# Altium PCB TFTAdapter Version 3.PcbDoc (part 2 of 3)
Units mm, origin at the board's own origin, x right, y up, seen from the top; angles counter-clockwise.
Board outline 130 x 67 mm, 4 copper layers (L1, L2, L3, L4), stack 0.905 mm thick; 77 components, 105 nets, 466 pads, 376 vias.
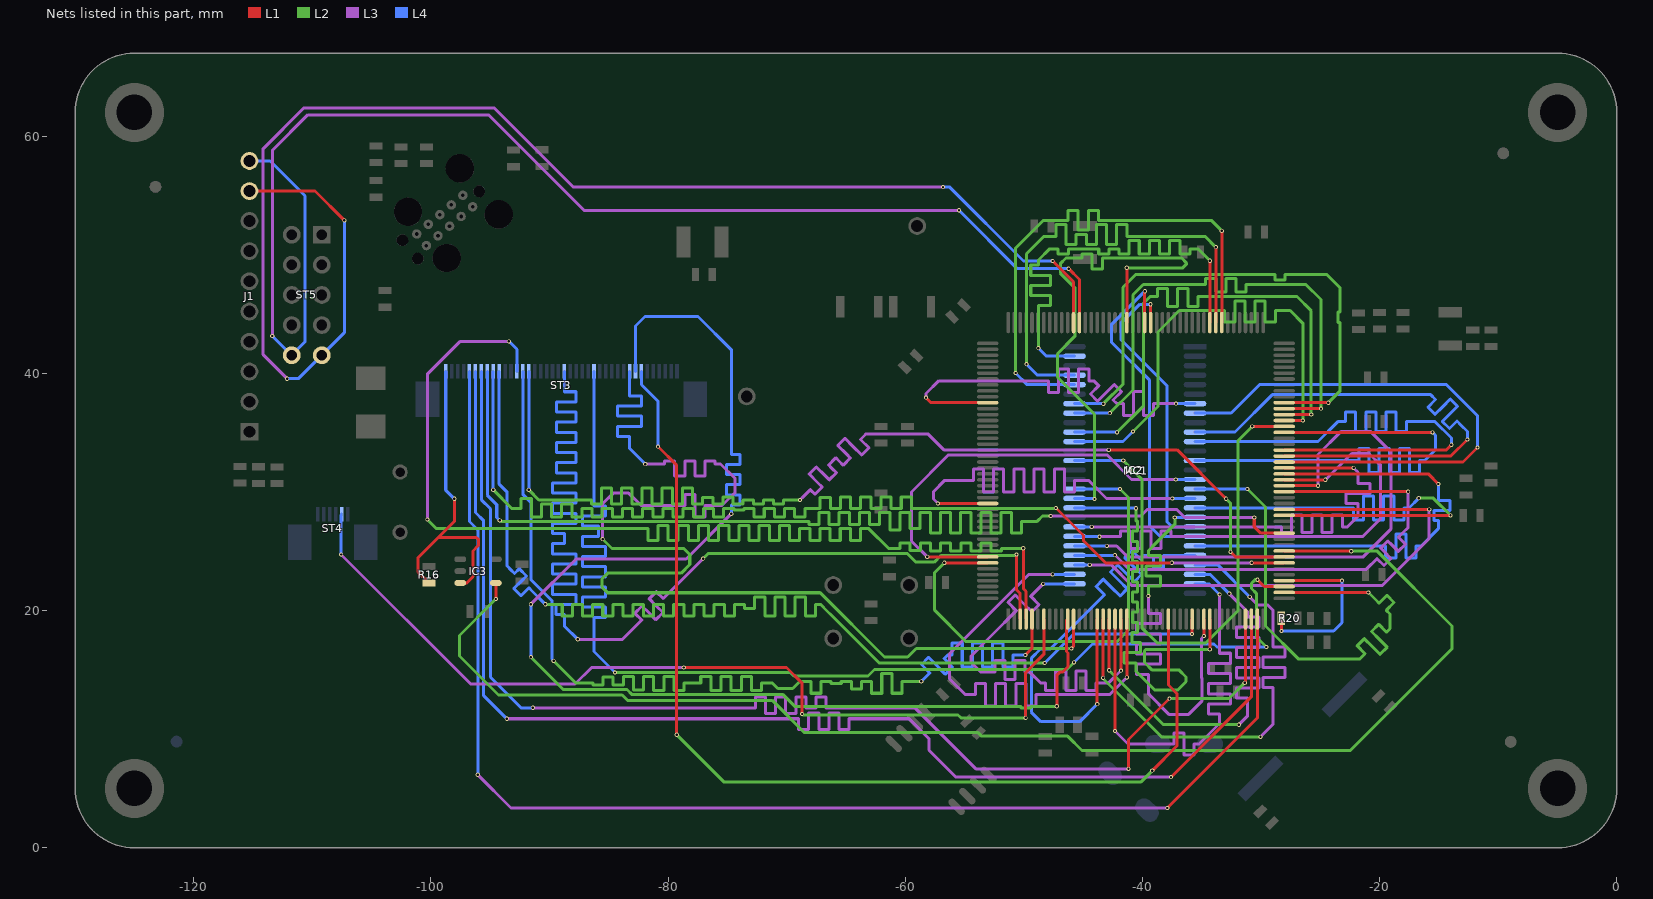
[diagram p4: the nets of this part, all layers, seen from the top]

## Via types
v1: diameter 0.35, hole 0.2, L1 to L4, 362 vias
v2: diameter 1, hole 0.5, L1 to L4, 14 vias

## Nets (pads, with @x,y where several pads share a name; then routed paths per layer and width w, separated by ;. In a path a pad name is that pad's centre, name@x,y a point inside that pad or via, vN(x,y) a via of type N, cw(c..) or ccw(c..) an arc to the next point about the centre after c; other vN are vias at no path point) (continued)
NetIC2_7: IC2.7 MC1.143 | length 47.6
  L1 w0.254: v1(-58.25,37.95) -57.825,37.525 MC1.143@-53.05,37.525
  L3 w0.254: v1(-58.25,37.95) -58.25,38.3 -57.175,39.375 -48.225,39.375 -47.943,39.375 -47.943,38.375 -47.089,38.375 -47.089,39.375 -47.089,40.375 -46.235,40.375 -46.235,39.375 -46.235,38.375 -45.381,38.375 -45.381,39.375 -45.381,40.375 -44.527,40.375 -44.527,39.375 -44.1,39.375 -43.685,38.96 -44.392,38.253 -43.788,37.649 -43.081,38.356 -42.374,39.063 -41.77,38.459 -42.477,37.752 -42.175,37.45 -41.614,37.45 -41.614,36.45 -40.76,36.45 -40.76,37.45 -40.76,38.45 -39.906,38.45 -39.906,37.45 -39.906,36.45 -39.052,36.45 -39.052,37.45 -38.625,37.45 v1(-37.175,37.45)
  L4 w0.254: v1(-37.175,37.45) IC2.7@-35.57,37.45
NetIC2_8: IC2.8 MC1.68 | length 45.4
  L1 w0.254: MC1.68@-28.05,32.525 -12.975,32.525 v1(-11.75,33.75)
  L4 w0.254: IC2.8@-35.57,36.65 -32.525,36.65 -30.123,39.052 -14.377,39.052 -11.75,36.425 v1(-11.75,33.75)
NetIC2_10: IC2.10 MC1.69 | length 47.7
  L1 w0.254: MC1.69@-28.05,33.025 -14,33.025 v1(-12.6,34.425)
  L4 w0.254: IC2.10@-35.57,35.05 -32.2,35.05 -29.05,38.2 -15.7,38.2 -15.289,37.789 -15.932,37.145 -15.328,36.541 -14.685,37.185 -14.041,37.828 -13.437,37.224 -14.081,36.581 -14.717,35.945 -14.113,35.341 -13.477,35.977 -13.175,35.675 -12.6,35.1 v1(-12.6,34.425)
NetIC2_11: IC2.11 MC1.70 | length 47.7
  L1 w0.254: MC1.70@-28.05,33.525 -14.4,33.525 v1(-13.95,33.975)
  L4 w0.254: IC2.11@-35.57,34.25 -25.2,34.25 -23.525,35.925 -23.3,35.925 -22.873,35.925 -22.873,36.755 -22.019,36.755 -22.019,35.925 -22.019,35.095 -21.165,35.095 -21.165,35.925 -21.165,36.755 -20.311,36.755 -20.311,35.925 -20.311,35.095 -19.457,35.095 -19.457,35.925 -19.457,36.755 -18.603,36.755 -18.603,35.925 -18.603,35.095 -17.749,35.095 -17.749,35.925 -16.35,35.925 -15.325,35.925 -13.95,34.55 v1(-13.95,33.975)
NetIC2_13: IC2.13 MC1.73 | length 46.7
  L1 w0.254: MC1.73@-28.05,35.025 v1(-15.55,35.025)
  L4 w0.254: IC2.13@-35.57,32.65 -22,32.65 -21.751,32.65 -21.751,33.65 -20.897,33.65 -20.897,32.65 -20.897,31.65 -20.043,31.65 -20.043,32.65 -20.043,33.65 -19.189,33.65 -19.189,32.65 -19.189,31.65 -18.335,31.65 -18.335,32.65 -18.335,33.65 -17.481,33.65 -17.481,32.65 -17.481,31.65 -16.627,31.65 -16.627,32.65 -16.2,32.65 -15.3,33.55 -15.3,34.775 v1(-15.55,35.025)
NetIC2_15: IC2.15 MC1.169 | length 37.2
  L1 w0.254: v1(-58.15,24.525) MC1.169@-53.05,24.525
  L3 w0.254: v1(-58.15,24.525) -59.475,25.85 -59.475,30 -56.35,33.125 -43,33.125 -40.925,31.05 v1(-37.2,31.05)
  L4 w0.254: v1(-37.2,31.05) IC2.15@-35.57,31.05
NetIC2_16: IC2.16 MC1.46 | length 47.7
  L1 w0.254: MC1.46@-28.05,21.525 v1(-20.95,21.525)
  L2 w0.254: v1(-31.15,30.25) -29.625,28.725 -29.625,18.7 -26.825,15.9 -21.7,15.9 -21.239,16.361 -21.899,17.022 -21.295,17.626 -20.635,16.965 -19.974,16.305 -19.371,16.909 -20.031,17.569 -20.691,18.229 -20.087,18.833 -19.427,18.173 -19.125,18.475 -19.125,19.7 -19.444,20.019 -18.784,20.679 -19.388,21.283 -20.048,20.623 -20.35,20.925 v1(-20.95,21.525)
  L4 w0.254: IC2.16@-35.57,30.25 v1(-31.15,30.25)
NetIC2_17: IC2.17 MC1.160 | length 47.7
  L1 w0.254: v1(-57.25,29.025) MC1.160@-53.05,29.025
  L3 w0.254: v1(-57.25,29.025) -57.625,29.4 -57.625,30.025 -56.675,30.975 -55.2,30.975 -54.267,30.975 -54.267,31.938 -53.413,31.938 -53.413,30.975 -53.413,30.012 -52.559,30.012 -52.559,30.975 -52.559,31.938 -51.705,31.938 -51.705,30.975 -51.705,30.012 -50.851,30.012 -50.851,30.975 -50.851,31.938 -49.997,31.938 -49.997,30.975 -49.997,30.012 -49.143,30.012 -49.143,30.975 -49.143,31.938 -48.289,31.938 -48.289,30.975 -48.289,30.012 -47.435,30.012 -47.435,30.975 -47.435,31.938 -46.581,31.938 -46.581,30.975 -46.581,30.012 -45.727,30.012 -45.727,30.975 -45.3,30.975 -44.55,30.975 -43.025,29.45 v1(-37.475,29.45)
  L4 w0.254: v1(-37.475,29.45) IC2.17@-35.57,29.45
NetIC2_18: IC2.18 MC1.59 | length 46.5
  L1 w0.254: MC1.59@-28.05,28.025 v1(-14.025,28.025)
  L2 w0.254: v1(-16.7,29.475) -15.475,29.475 v1(-14.025,28.025)
  L4 w0.254: IC2.18@-35.57,28.65 -23.05,28.65 -22.222,28.65 -22.222,27.65 -21.368,27.65 -21.368,28.65 -21.368,29.65 -20.514,29.65 -20.514,28.65 -20.514,27.65 -19.66,27.65 -19.66,28.65 -19.66,29.65 -18.806,29.65 -18.806,28.65 -18.806,27.65 -17.952,27.65 -17.952,28.65 -17.525,28.65 v1(-16.7,29.475)
NetIC2_19: IC2.19 MC1.34 | length 46.6
  L1 w0.254: v1(-34.825,17.85) -34.825,19.269 MC1.34@-34.815,19.279
  L3 w0.254: v1(-39.5,21.225) -39.5,20.175 -39.5,19.748 -38.5,19.748 -38.5,18.894 -39.5,18.894 -40.5,18.894 -40.5,18.04 -39.5,18.04 -38.5,18.04 -38.5,17.186 -39.5,17.186 -40.5,17.186 -40.5,16.332 -39.5,16.332 -38.5,16.332 -38.5,15.478 -39.5,15.478 -40.5,15.478 -40.5,14.624 -39.5,14.624 -39.5,14.325 -39.5,12.975 -37.775,11.25 -36.1,11.25 -34.998,12.352 -34.998,14.292 -35.025,14.319 -35.025,17.65 v1(-34.825,17.85)
  L2 w0.254: v1(-39.5,21.225) -39.5,21.7 -39.5,22.061 -38.5,22.061 -38.5,22.915 -39.5,22.915 -39.696,22.915 -39.696,23.769 -39.5,23.769 -38.5,23.769 -38.5,24.623 -39.5,24.623 -39.5,25.05 -39.352,25.198 -39.05,25.5 -37.275,27.275 v1(-37.275,27.85)
  L4 w0.254: v1(-37.275,27.85) IC2.19@-35.57,27.85
NetIC2_20: IC2.20 MC1.108 | length 25.6
  L1 w0.254: v1(-39.325,45.825) -39.325,44.289 MC1.108@-39.315,44.279
  L4 w0.254: v1(-39.325,45.825) -40.225,45.825 -41.825,44.225 -41.825,42.85 -37.95,38.975 -37.95,27.5 -37.5,27.05 IC2.20@-35.57,27.05
NetIC2_21: IC2.21 MC1.109 | length 29.1
  L1 w0.254: MC1.109@-39.815,44.279 -39.815,46.91 v1(-39.8,46.925)
  L4 w0.254: v1(-39.8,46.925) -42.625,44.1 -42.625,42.65 -39.425,39.45 -39.425,27.175 -38.5,26.25 IC2.21@-35.57,26.25
NetIC2_22: IC2.22 MC1.66 | length 47
  L1 w0.254: MC1.66@-28.05,31.525 -15.9,31.525 v1(-15.05,30.675)
  L4 w0.254: IC2.22@-35.57,25.45 -21.425,25.45 -19.489,25.45 -19.489,24.45 -18.635,24.45 -18.635,25.45 -18.635,26.45 -17.781,26.45 -17.781,25.45 -17.781,24.45 -16.927,24.45 -16.927,25.45 -16.5,25.45 -15.05,26.9 -15.05,27.59 -15.431,27.59 -15.431,28.444 -15.05,28.444 -14.05,28.444 -14.05,29.298 -15.05,29.298 -15.05,29.725 v1(-15.05,30.675)
NetIC2_23: IC2.23 MC1.16 | length 47.6
  L1 w0.254: v1(-43.815,12.11) MC1.16@-43.815,19.279
  L4 w0.254: v1(-43.815,12.11) -45.3,10.625 -48.575,10.625 -49.375,11.425 -49.375,15.975 -48.6,16.75 -47.775,16.75 -44.775,19.75 -43.196,21.329 -43.903,22.036 -43.3,22.64 -42.592,21.933 -41.885,21.225 -41.281,21.829 -41.989,22.536 -42.696,23.244 -42.092,23.847 -41.385,23.14 -40.678,22.433 -40.074,23.037 -40.781,23.744 -41.488,24.451 -40.884,25.055 -40.177,24.348 -39.875,24.65 -39.081,24.65 -39.081,23.65 -38.227,23.65 -38.227,24.65 -37.8,24.65 IC2.23@-35.57,24.65
NetIC2_24: IC2.24 MC1.17 | length 46.9
  L1 w0.254: v1(-43.322,14.326) -43.322,19.272 MC1.17@-43.315,19.279
  L3 w0.254: v1(-30.95,21.15) -30.25,20.45 -29.425,20.45 -29,20.025 -29,17.35 -29,16.923 -28,16.923 -28,16.069 -29,16.069 -29.835,16.069 -29.835,15.215 -29,15.215 -28,15.215 -28,14.361 -29,14.361 -29.835,14.361 -29.835,13.507 -29,13.507 -29,11.375 -29,10.4 v1(-30.05,9.35)
  L2 w0.254: v1(-43.322,14.326) -43.322,14.272 -38.4,9.35 v1(-30.05,9.35)
  L4 w0.254: IC2.24@-35.57,23.85 -33.65,23.85 v1(-30.95,21.15)
NetIC2_25: IC2.25 MC1.18 | length 47.7
  L1 w0.254: v1(-42.815,14.965) MC1.18@-42.815,19.279
  L3 w0.254: v1(-32.675,21.425) -31.125,19.875 -31.125,19.448 -30.189,19.448 -30.189,18.594 -31.125,18.594 -32.061,18.594 -32.061,17.74 -31.125,17.74 -30.189,17.74 -30.189,16.886 -31.125,16.886 -32.061,16.886 -32.061,16.032 -31.125,16.032 -30.189,16.032 -30.189,15.178 -31.125,15.178 -32.061,15.178 -32.061,14.324 -31.125,14.324 -30.189,14.324 -30.189,13.47 -31.125,13.47 -32.061,13.47 -32.061,12.616 -31.125,12.616 -31.125,11.125 v1(-31.875,10.375)
  L2 w0.254: v1(-42.815,14.965) -38.225,10.375 v1(-31.875,10.375)
  L4 w0.254: IC2.25@-35.57,23.05 -34.3,23.05 v1(-32.675,21.425)
NetIC2_26: IC2.26 MC1.19 | length 47.7
  L1 w0.254: v1(-42.315,9.84) MC1.19@-42.315,19.279
  L3 w0.254: v1(-42.315,9.84) -41.225,8.75 -38.7,8.75 -37.36,8.75 -37.36,9.685 -36.506,9.685 -36.506,8.75 -36.506,7.815 -35.652,7.815 -35.652,8.75 -35.225,8.75 -33.5,10.475 -33.5,11.274 -34.435,11.274 -34.435,12.128 -33.5,12.128 -32.565,12.128 -32.565,12.982 -33.5,12.982 -34.435,12.982 -34.435,13.836 -33.5,13.836 -32.565,13.836 -32.565,14.69 -33.5,14.69 -34.435,14.69 -34.435,15.544 -33.5,15.544 -32.565,15.544 -32.565,16.398 -33.5,16.398 -33.5,16.825 v1(-33.5,21.35)
  L4 w0.254: IC2.26@-35.57,22.25 -34.4,22.25 v1(-33.5,21.35)
NetIC2_29: IC2.29 MC1.20 | length 47
  L1 w0.254: v1(-41.815,14.935) MC1.20@-41.815,19.279
  L3 w0.254: v1(-48.375,22.25) -49.125,21.5 -49.427,21.198 -48.72,20.491 -49.324,19.887 -50.031,20.594 -50.738,21.301 -51.342,20.697 -50.635,19.99 -52.737,17.887 -54.45,16.175 -54.45,15.625 -53.625,14.8 -52.875,14.8 -52.448,14.8 -52.448,15.8 -51.594,15.8 -51.594,14.8 -51.594,14.191 -50.74,14.191 -50.74,14.8 -50.74,15.8 -49.886,15.8 -49.886,14.8 -49.5,14.8 -48.6,13.9 -48.173,13.9 -48.173,13.254 -47.319,13.254 -47.319,13.9 -47.319,14.9 -46.465,14.9 -46.465,13.9 -46.465,13.254 -45.611,13.254 -45.611,13.9 -45.611,14.9 -44.757,14.9 -44.757,13.9 -44.757,13.254 -43.903,13.254 -43.903,13.9 -43.049,13.9 -42.85,13.9 v1(-41.815,14.935)
  L4 w0.254: v1(-48.375,22.25) IC2.29@-45.73,22.25
NetIC2_30: IC2.30 MC1.21 | length 47.7
  L1 w0.254: v1(-41.315,14.36) MC1.21@-41.315,19.279
  L3 w0.254: v1(-47.575,23.05) -49.575,23.05 -56.275,16.35 -56.275,14.25 -54.925,12.9 -54.525,12.9 -54.098,12.9 -54.098,13.837 -53.244,13.837 -53.244,12.9 -53.244,11.963 -52.39,11.963 -52.39,12.9 -52.39,13.837 -51.536,13.837 -51.536,12.9 -51.536,11.963 -50.682,11.963 -50.682,12.9 -50.682,13.837 -49.828,13.837 -49.828,12.9 -49.828,11.963 -48.974,11.963 -48.974,12.9 -44.3,12.9 -42.775,12.9 v1(-41.315,14.36)
  L4 w0.254: v1(-47.575,23.05) IC2.30@-45.73,23.05
NetIC2_31: IC2.31 MC1.60 | length 47
  L1 w0.254: MC1.60@-28.05,28.525 v1(-15.825,28.525)
  L3 w0.254: v1(-44.45,23.85) -42.625,23.85 -40.875,22.1 -19.8,22.1 -15.825,26.075 v1(-15.825,28.525)
  L4 w0.254: IC2.31@-45.73,23.85 v1(-44.45,23.85)
NetIC2_32: IC2.32 MC1.63 | length 47.7
  L1 w0.254: MC1.63@-28.05,30.025 v1(-17.6,30.025)
  L3 w0.254: v1(-42.325,24.675) -41.125,23.475 -21.125,23.475 -20.226,24.374 -19.641,23.789 -19.037,24.393 -19.622,24.978 -19.913,25.268 -19.309,25.872 -19.018,25.582 -18.433,24.996 -17.829,25.6 -18.414,26.186 -18.113,26.487 -17.6,27 v1(-17.6,30.025)
  L4 w0.254: IC2.32@-45.73,24.65 -42.35,24.65 v1(-42.325,24.675)
NetIC2_33: IC2.33 MC1.64 | length 47.7
  L1 w0.254: MC1.64@-28.05,30.525 v1(-25.2,30.525)
  L3 w0.254: v1(-43,25.45) -42.175,25.45 -41.225,24.5 -21.425,24.5 -19.025,26.9 -19.025,33.35 -20.75,35.075 -23.275,35.075 -25.2,33.15 v1(-25.2,30.525)
  L4 w0.254: IC2.33@-45.73,25.45 v1(-43,25.45)
NetIC2_34: IC2.34 MC1.65 | length 47.2
  L1 w0.254: MC1.65@-28.05,31.025 v1(-24.575,31.025)
  L3 w0.254: v1(-43.625,26.225) -42.275,26.225 -41.848,26.225 -41.848,26.696 -40.994,26.696 -40.994,26.225 -40.994,25.225 -40.14,25.225 -40.14,26.225 -40.14,26.696 -39.286,26.696 -39.286,26.225 -39.286,25.225 -38.432,25.225 -38.432,26.225 -38.432,26.696 -37.578,26.696 -37.578,26.225 -35.4,26.225 -21.45,26.225 -19.95,27.725 -19.95,32.3 -20.9,33.25 -22.35,33.25 v1(-24.575,31.025)
  L4 w0.254: IC2.34@-45.73,26.25 -43.65,26.25 v1(-43.625,26.225)
NetIC2_35: IC2.35 MC1.67 | length 47.2
  L1 w0.254: MC1.67@-28.05,32.025 v1(-22.2,32.025)
  L3 w0.254: v1(-44.275,27.05) -28.375,27.05 -28.276,27.05 -28.276,26.579 -27.422,26.579 -27.422,27.05 -27.422,28.05 -26.568,28.05 -26.568,27.05 -26.568,26.579 -25.714,26.579 -25.714,27.05 -25.714,28.05 -24.86,28.05 -24.86,27.05 -24.86,26.579 -24.006,26.579 -24.006,27.05 -24.006,28.05 -23.152,28.05 -23.152,27.05 -22.725,27.05 -21.825,27.95 -21.825,28.161 -21.825,29.015 -22.825,29.015 -22.825,29.869 -21.825,29.869 -20.825,29.869 -20.825,30.723 -21.825,30.723 -21.825,31.15 -21.825,31.65 v1(-22.2,32.025)
  L4 w0.254: IC2.35@-45.73,27.05 v1(-44.275,27.05)
NetIC2_37: IC2.37 MC1.35 | length 45.5
  L1 w0.254: v1(-34.325,16.725) -34.325,19.269 MC1.35@-34.315,19.279
  L2 w0.254: v1(-40.55,28.625) -40.55,27.975 -40.55,27.548 -40.404,27.548 -40.404,26.694 -40.55,26.694 -40.821,26.694 -40.821,25.84 -40.55,25.84 -40.404,25.84 -40.404,24.986 -40.55,24.986 -40.821,24.986 -40.821,24.132 -40.55,24.132 -40.404,24.132 -40.404,23.278 -40.55,23.278 -40.821,23.278 -40.821,22.424 -40.55,22.424 -40.404,22.424 -40.404,21.57 -40.55,21.57 -40.821,21.57 -40.821,20.716 -40.55,20.716 -40.404,20.716 -40.404,19.862 -40.55,19.862 -40.821,19.862 -40.821,19.008 -40.55,19.008 -40.404,19.008 -40.404,18.154 -40.55,18.154 -40.88,18.154 -40.88,17.3 -40.55,17.3 -40.179,17.3 -40.179,16.446 -40.55,16.446 -41.55,16.446 -41.55,15.592 -40.55,15.592 -40.55,14.875 -38.975,13.3 -37.025,13.3 -36.325,14 -36.325,14.4 -36.9,14.975 -39.175,14.975 -39.825,15.625 -39.825,16.6 -39.7,16.725 v1(-34.325,16.725)
  L4 w0.254: IC2.37@-45.73,28.65 -40.575,28.65 v1(-40.55,28.625)
NetIC2_38: IC2.38 MC1.112 | length 47.4
  L1 w0.254: v1(-41.325,48.9) -41.325,44.289 MC1.112@-41.315,44.279
  L2 w0.254: v1(-44.05,29.4) -44.05,36.55 -47.175,39.675 -47.175,41.65 -45.7,43.125 -45.7,47.225 -46.925,48.45 -46.925,49.25 -46.45,49.725 -45.525,49.725 -45.098,49.725 -45.098,50.062 -44.244,50.062 -44.244,49.725 -44.244,48.809 -43.39,48.809 -43.39,49.725 -39.85,49.725 -36.7,49.725 -36.3,49.325 -36.3,49.2 -36.6,48.9 v1(-41.325,48.9)
  L4 w0.254: IC2.38@-45.73,29.45 -44.1,29.45 v1(-44.05,29.4)
NetIC2_39: IC2.39 MC1.170 | length 41.9
  L1 w0.254: v1(-56.7,24.025) MC1.170@-53.05,24.025
  L2 w0.254: v1(-56.7,24.025) -57.525,23.2 -57.525,20.025 -54.875,17.375 -42.15,17.375 -41.175,18.35 -41.175,29.525 v1(-41.9,30.25)
  L4 w0.254: IC2.39@-45.73,30.25 v1(-41.9,30.25)
NetIC2_42: IC2.42 MC1.74 | length 47.4
  L1 w0.254: v1(-30.75,35.525) MC1.74@-28.05,35.525
  L2 w0.254: v1(-41.625,32.65) -40.05,31.075 -40.05,18.55 -38.775,17.275 -34.65,17.275 -31.95,19.975 -31.95,20.981 -31.952,20.983 -31.952,21.317 -31.95,21.319 -31.95,22.856 -31.952,22.858 -31.952,34.323 v1(-30.75,35.525)
  L4 w0.254: IC2.42@-45.73,32.65 v1(-41.625,32.65)
NetIC2_44: IC2.44 MC1.75 | length 46.8
  L1 w0.254: MC1.75@-28.05,36.025 v1(-26.475,36.025)
  L2 w0.254: v1(-40.8,35.1) -38.7,37.2 -38.7,43.488 -36.888,45.3 -35.18,45.3 -34.05,45.3 -33.072,45.3 -33.072,44.32 -32.218,44.32 -32.218,45.3 -32.218,46.101 -31.364,46.101 -31.364,45.3 -31.364,44.32 -30.51,44.32 -30.51,45.3 -30.51,46.101 -29.656,46.101 -29.656,45.3 -29.656,44.32 -28.802,44.32 -28.802,45.3 -28.375,45.3 -27.55,45.3 -26.475,44.225 v1(-26.475,36.025)
  L4 w0.254: IC2.44@-45.73,34.25 -41.65,34.25 v1(-40.8,35.1)
NetIC2_45: IC2.45 MC1.76 | length 47.3
  L1 w0.254: MC1.76@-28.05,36.525 v1(-25.775,36.525)
  L2 w0.254: v1(-42.15,35.025) -39.9,37.275 -39.9,45.925 -39.35,46.475 -39.225,46.475 -38.743,46.475 -38.743,47.146 -37.889,47.146 -37.889,46.475 -37.889,45.654 -37.035,45.654 -37.035,46.475 -37.035,47.146 -36.181,47.146 -36.181,46.475 -36.181,45.654 -35.327,45.654 -35.327,46.475 -34.9,46.475 -26.975,46.475 -25.775,45.275 v1(-25.775,36.525)
  L4 w0.254: IC2.45@-45.73,35.05 -42.175,35.05 v1(-42.15,35.025)
NetIC2_47: IC2.47 MC1.77 | length 47.4
  L1 w0.254: MC1.77@-28.05,37.025 v1(-24.95,37.025)
  L2 w0.254: v1(-42.75,36.65) -40.8,38.6 -40.8,46.625 -39.925,47.5 -37.625,47.5 -34.668,47.5 -34.668,47.981 -33.814,47.981 -33.814,47.5 -33.814,46.844 -32.96,46.844 -32.96,47.5 -32.96,47.981 -32.106,47.981 -32.106,47.5 -32.106,46.844 -31.252,46.844 -31.252,47.5 -30.825,47.5 -26.225,47.5 -24.95,46.225 v1(-24.95,37.025)
  L4 w0.254: IC2.47@-45.73,36.65 v1(-42.75,36.65)
NetIC2_48: IC2.48 MC1.78 | length 47.4
  L1 w0.254: MC1.78@-28.05,37.525 v1(-24.325,37.525)
  L2 w0.254: v1(-43.3,37.425) -41.65,39.075 -41.65,47.25 -40.55,48.35 -39.425,48.35 -28.831,48.35 -28.831,47.854 -27.977,47.854 -27.977,48.35 -27.55,48.35 -24.475,48.35 -23.325,47.2 -23.325,45.156 -23.494,45.156 -23.494,44.302 -23.325,44.302 -23.325,43.875 -23.325,38.525 v1(-24.325,37.525)
  L4 w0.254: IC2.48@-45.73,37.45 -43.325,37.45 v1(-43.3,37.425)
NetIC2_50: IC2.50 MC1.96 | length 47.4
  L1 w0.254: MC1.96@-33.315,44.279 v1(-33.315,52.015)
  L2 w0.254: v1(-50.7,40.025) -50.7,50.55 -48.35,52.9 -46.7,52.9 -46.273,52.9 -46.273,53.733 -45.419,53.733 -45.419,52.9 -45.419,52.071 -44.565,52.071 -44.565,52.9 -44.565,53.733 -43.711,53.733 -43.711,52.9 -38.125,52.9 -34.2,52.9 v1(-33.315,52.015)
  L4 w0.254: v1(-50.7,40.025) -49.725,39.05 IC2.50@-45.73,39.05
NetIC2_51: IC2.51 MC1.97 | length 47.4
  L1 w0.254: MC1.97@-33.815,44.279 v1(-33.815,50.64)
  L2 w0.254: v1(-49.775,40.775) -49.775,50.075 -48.3,51.55 -47.725,51.55 -47.298,51.55 -47.298,52.534 -46.444,52.534 -46.444,51.55 -46.444,50.866 -45.59,50.866 -45.59,51.55 -45.59,51.705 -44.736,51.705 -44.736,51.55 -44.736,50.866 -43.882,50.866 -43.882,51.55 -43.882,52.534 -43.028,52.534 -43.028,51.55 -43.028,50.866 -42.174,50.866 -42.174,51.55 -42.174,52.534 -41.32,52.534 -41.32,51.55 -35.425,51.55 -34.725,51.55 v1(-33.815,50.64)
  L4 w0.254: v1(-49.775,40.775) -48.85,39.85 IC2.51@-45.73,39.85
NetIC2_53: IC2.53 MC1.98 | length 47
  L1 w0.254: MC1.98@-34.315,44.279 v1(-34.315,49.49)
  L2 w0.254: v1(-48.775,42.125) -48.775,45.2 -48.775,45.707 -47.775,45.707 -47.775,46.561 -48.775,46.561 -49.421,46.561 -49.421,47.415 -48.775,47.415 -47.775,47.415 -47.775,48.269 -48.775,48.269 -49.421,48.269 -49.421,49.123 -48.775,49.123 -48.775,49.55 -47.825,50.5 -47.104,50.5 -47.104,50.079 -46.25,50.079 -46.25,50.5 -45.396,50.5 -44.542,50.5 -43.688,50.5 -43.688,50.079 -42.834,50.079 -42.834,50.5 -41.98,50.5 -41.98,50.079 -41.126,50.079 -41.126,50.5 -41.126,51.196 -40.272,51.196 -40.272,50.5 -40.272,50.079 -39.418,50.079 -39.418,50.5 -39.418,51.196 -38.564,51.196 -38.564,50.5 -38.564,50.079 -37.71,50.079 -37.71,50.5 -37.71,51.196 -36.856,51.196 -36.856,50.5 -36.856,50.079 -36.002,50.079 -36.002,50.5 -35.575,50.5 -35.325,50.5 v1(-34.315,49.49)
  L4 w0.254: v1(-48.775,42.125) -48.1,41.45 IC2.53@-45.73,41.45
NetIC3_3: IC3.3 R16.2 ST3.1 | length 27.9
  L1 w0.254: R16.2@-100.15,22.325 -101.1,23.275 -101.1,24.425 -99.375,26.15 ; v1(-98.025,29.425) -98.025,27.5 -99.375,26.15 ; IC3.3@-97.525,22.325 -96.975,22.325 -96.45,22.85 -96.45,25.025 -96,25.475 -96,26 -96.15,26.15 -99.375,26.15
  L4 w0.254: ST3.1@-98.75,40.175 -98.75,30.15 v1(-98.025,29.425)
NetIC3_4: IC3.4 MC1.53 | length 116.7
  L1 w0.254: v1(-94.525,20.975) IC3.4@-94.525,22.325 ; MC1.53@-28.05,25.025 -22.425,25.025 v1(-22.4,25)
  L2 w0.254: v1(-94.525,20.975) -97.6,17.9 -97.6,16.175 -94.3,12.875 -83.875,12.875 -83.425,12.425 -71.225,12.425 -68.5,9.7 -53.85,9.7 -53.56,9.41 -46.31,9.41 -45.1,8.2 -22.475,8.2 -13.9,16.775 -13.9,18.7 -20.2,25 v1(-22.4,25)
NetJ1_9: J1.9 MC1.121 ST5.9 | length 124.4
  L1 w0.254: J1.9@-115.3,55.37 -109.77,55.37 v1(-107.3,52.9) ; v1(-47.575,49.475) -45.815,47.715 MC1.121@-45.815,44.279
  L3 w0.254: v1(-112.125,39.55) -114.15,41.575 -114.15,58.95 -110.725,62.375 -94.65,62.375 -87.975,55.7 v1(-56.825,55.7)
  L4 w0.254: v1(-112.125,39.55) -111.18,39.55 ST5.9@-109.2,41.53 -107.3,43.43 v1(-107.3,52.9) ; v1(-56.825,55.7) -56.25,55.7 -50.025,49.475 v1(-47.575,49.475)
NetJ1_10: J1.10 MC1.120 ST5.10 | length 116.4
  L1 w0.254: v1(-46.225,48.825) -45.315,47.915 MC1.120@-45.315,44.279
  L3 w0.254: v1(-113.375,43.15) -113.375,58.8 -110.375,61.8 -95.15,61.8 -87.1,53.75 v1(-55.475,53.75)
  L4 w0.254: J1.10@-115.3,57.91 -113.56,57.91 -110.625,54.975 -110.625,42.66 -111.755,41.53 v1(-113.375,43.15) ; v1(-55.475,53.75) -50.55,48.825 v1(-46.225,48.825)
NetMC1_3: MC1.3 ST3.21 | length 112.7
  L1 w0.254: v1(-50.625,24.725) -50.625,21.75 -50.315,21.44 MC1.3@-50.315,19.279
  L3 w0.254: v1(-87.625,17.575) -83.85,17.575 -82.525,18.9 -82.223,19.202 -82.802,19.781 -82.198,20.384 -81.619,19.806 -81.041,19.227 -80.437,19.831 -81.015,20.41 -81.594,20.988 -80.99,21.592 -80.411,21.014 -79.137,22.288 v1(-77.05,24.375)
  L2 w0.254: v1(-77.05,24.375) -76.6,24.825 -59.85,24.825 -59.107,24.082 -57.568,24.082 -57,24.65 -50.7,24.65 v1(-50.625,24.725)
  L4 w0.254: ST3.21@-88.75,40.175 -88.75,38.875 -88.75,38.448 -87.75,38.448 -87.75,37.594 -88.75,37.594 -89.4,37.594 -89.4,36.74 -88.75,36.74 -87.75,36.74 -87.75,35.886 -88.75,35.886 -89.396,35.886 -89.396,35.032 -88.75,35.032 -87.75,35.032 -87.75,34.178 -88.75,34.178 -89.396,34.178 -89.396,33.324 -88.75,33.324 -87.75,33.324 -87.75,32.47 -88.75,32.47 -89.396,32.47 -89.396,31.616 -88.75,31.616 -87.75,31.616 -87.75,30.762 -88.75,30.762 -89.75,30.762 -89.75,29.908 -88.75,29.908 -87.75,29.908 -87.75,29.054 -88.75,29.054 -89.75,29.054 -89.75,28.2 -88.75,28.2 -87.75,28.2 -87.75,27.346 -88.75,27.346 -89.75,27.346 -89.75,26.492 -88.75,26.492 -88.75,25.638 -89.75,25.638 -89.75,24.784 -88.75,24.784 -87.75,24.784 -87.75,23.93 -88.75,23.93 -89.75,23.93 -89.75,23.076 -88.75,23.076 -87.75,23.076 -87.75,22.222 -88.75,22.222 -89.75,22.222 -89.75,21.368 -88.75,21.368 -87.75,21.368 -87.75,20.514 -88.75,20.514 -89.446,20.514 -89.446,19.66 -88.75,19.66 -88.75,19.2 -88.75,18.7 v1(-87.625,17.575)
NetMC1_4: MC1.4 ST3.13 | length 112.7
  L1 w0.254: v1(-50.05,25.25) -50.05,21.85 -49.815,21.615 MC1.4@-49.815,19.279
  L3 w0.254: v1(-100.3,27.675) -100.3,39.925 -97.525,42.7 v1(-93.425,42.7)
  L2 w0.254: v1(-100.3,27.675) -99.525,26.9 -82.725,26.9 -81.711,26.9 -81.711,25.908 -80.857,25.908 -80.857,26.9 -80.857,27.163 -80.003,27.163 -80.003,26.9 -80.003,25.908 -79.149,25.908 -79.149,26.9 -79.149,27.163 -78.295,27.163 -78.295,26.9 -78.295,25.908 -77.441,25.908 -77.441,26.9 -77.441,27.163 -76.587,27.163 -76.587,26.9 -76.587,25.908 -75.733,25.908 -75.733,26.9 -75.733,27.163 -74.879,27.163 -74.879,26.9 -74.879,25.908 -74.025,25.908 -74.025,26.9 -74.025,27.163 -73.171,27.163 -73.171,26.9 -73.171,25.908 -72.317,25.908 -72.317,26.9 -72.317,27.163 -71.463,27.163 -71.463,26.9 -71.463,25.908 -70.609,25.908 -70.609,26.9 -70.609,27.163 -69.755,27.163 -69.755,26.9 -69.755,25.908 -68.901,25.908 -68.901,26.9 -68.047,26.9 -68.047,25.908 -67.193,25.908 -67.193,26.9 -66.339,26.9 -66.339,25.908 -65.485,25.908 -65.485,26.9 -64.631,26.9 -64.631,25.908 -63.777,25.908 -63.777,26.9 -63.35,26.9 -63.075,26.9 -61.425,25.25 -60.825,25.25 -60.442,25.25 -60.442,25.696 -59.588,25.696 -59.588,25.25 -59.588,25.064 -58.734,25.064 -58.734,25.25 -58.734,25.696 -57.88,25.696 -57.88,25.25 -57.88,25.003 -57.026,25.003 -57.026,25.25 -57.026,25.696 -56.172,25.696 -56.172,25.25 -56.172,25.004 -55.318,25.004 -55.318,25.25 -55.318,25.696 -54.464,25.696 -54.464,25.25 -54.464,25.004 -53.61,25.004 -53.61,25.25 -53.61,25.696 -52.756,25.696 -52.756,25.25 -52.756,25.004 -51.902,25.004 -51.902,25.25 -51.475,25.25 v1(-50.05,25.25)
  L4 w0.254: v1(-93.425,42.7) -92.75,42.025 ST3.13@-92.75,40.175
NetMC1_5: MC1.5 ST3.14 | length 111.3
  L1 w0.254: v1(-49.875,16.25) -49.315,16.81 MC1.5@-49.315,19.279
  L2 w0.254: v1(-89.65,15.75) -88,14.1 -87.775,13.875 -86.338,13.875 -86.338,13.704 -85.484,13.704 -85.484,13.875 -85.484,14.404 -84.63,14.404 -84.63,13.875 -84.63,13.704 -83.776,13.704 -83.776,13.875 -83.776,14.421 -82.922,14.421 -82.922,13.875 -82.922,13.298 -82.068,13.298 -82.068,13.875 -82.068,14.421 -81.214,14.421 -81.214,13.875 -81.214,13.254 -80.36,13.254 -80.36,13.875 -80.36,14.421 -79.506,14.421 -79.506,13.875 -79.506,13.254 -78.652,13.254 -78.652,13.875 -78.225,13.875 -77.675,13.875 -77.248,13.875 -77.248,14.421 -76.394,14.421 -76.394,13.875 -76.394,13.254 -75.54,13.254 -75.54,13.875 -75.54,14.421 -74.686,14.421 -74.686,13.875 -74.686,13.254 -73.832,13.254 -73.832,13.875 -73.832,14.421 -72.978,14.421 -72.978,13.875 -72.978,13.254 -72.124,13.254 -72.124,13.875 -71.325,13.875 -71.2,13.875 -70.75,13.425 -69.5,13.425 -68.9,14.025 -68.817,14.025 -67.963,14.025 -67.963,13.025 -67.109,13.025 -67.109,14.025 -66.255,14.025 -66.255,13.857 -65.401,13.857 -65.401,14.025 -64.547,14.025 -64.547,13.377 -63.693,13.377 -63.693,14.025 -62.839,14.025 -62.839,13.025 -61.985,13.025 -61.985,14.025 -61.985,14.671 -61.131,14.671 -61.131,14.025 -61.131,13.025 -60.277,13.025 -60.277,14.025 -59.85,14.025 v1(-58.65,14.025)
  L4 w0.254: ST3.14@-92.25,40.175 -92.25,29.8 -91.55,29.1 -91.55,22.575 -89.8,20.825 -89.8,15.9 v1(-89.65,15.75) ; v1(-58.65,14.025) -58.175,14.5 -57.935,14.74 -58.642,15.447 -58.038,16.051 -57.331,15.344 -56.624,14.637 -56.02,15.241 -56.727,15.948 -56.425,16.25 -56.051,16.25 -56.051,17.25 -55.197,17.25 -55.197,16.25 -55.197,15.25 -54.343,15.25 -54.343,16.25 -54.343,17.25 -53.489,17.25 -53.489,16.25 -53.489,15.25 -52.635,15.25 -52.635,16.25 -52.635,17.25 -51.781,17.25 -51.781,16.25 -51.781,15.25 -50.927,15.25 -50.927,16.25 -50.5,16.25 v1(-49.875,16.25)
NetMC1_7: MC1.7 ST4.5 | length 78.5
  L1 w0.254: v1(-78.675,15.2) -70.025,15.2 -68.7,13.875 v1(-68.7,11.275) ; v1(-49.85,10.95) -49.85,14.775 -48.315,16.31 MC1.7@-48.315,19.279
  L3 w0.254: v1(-107.575,24.725) -96.65,13.8 -87.85,13.8 -86.45,15.2 v1(-78.675,15.2)
  L2 w0.254: v1(-68.7,11.275) -68.625,11.2 -55.55,11.2 -55.3,10.95 v1(-49.85,10.95)
  L4 w0.254: v1(-107.575,24.725) -107.575,28.075 ST4.5@-107.525,28.125
NetMC1_11: MC1.11 ST3.33 | length 112.1
  L1 w0.254: v1(-47.225,11.925) -47.225,14.55 -46.975,14.8 -46.736,14.8 -46.275,15.261 -46.275,16.425 -46.402,16.552 -46.402,19.192 MC1.11@-46.315,19.279
  L3 w0.254: v1(-91.575,20.525) -87.75,24.35 -78.475,24.35 v1(-74.675,28.15)
  L2 w0.254: v1(-91.575,16.075) -88.85,13.35 -83.475,13.35 -83.025,12.9 -70.3,12.9 -69.325,11.925 -67.319,11.925 -50.255,11.925 -50.255,11.779 -49.401,11.779 -49.401,11.925 -48.974,11.925 v1(-47.225,11.925)
  L4 w0.254: v1(-91.575,16.075) v1(-91.575,20.525) ; ST3.33@-82.75,40.175 -82.75,44 -81.95,44.8 -77.475,44.8 -74.675,42 -74.675,33.6 -74.675,33.173 -73.929,33.173 -73.929,32.319 -74.675,32.319 -75.071,32.319 -75.071,31.465 -74.675,31.465 -73.929,31.465 -73.929,30.611 -74.675,30.611 -75.071,30.611 -75.071,29.757 -74.675,29.757 -73.929,29.757 -73.929,28.903 -74.675,28.903 -74.675,28.825 v1(-74.675,28.15)
NetMC1_12: MC1.12 ST3.32 | length 112.7
  L1 w0.254: v1(-46,16.8) -45.815,16.985 MC1.12@-45.815,19.279
  L3 w0.254: v1(-85.525,26.025) -85.525,29 -84.625,29.9 -83.325,29.9 -82.275,28.85 -81.05,28.85 -78.585,28.85 -78.585,29.804 -77.731,29.804 -77.731,28.85 -77.731,27.896 -76.877,27.896 -76.877,28.85 -76.45,28.85 -75.45,28.85 -74.35,29.95 -74.35,31.125 -75.575,32.35 -75.75,32.35 -76.028,32.35 -76.028,32.621 -76.882,32.621 -76.882,32.35 -76.882,31.35 -77.736,31.35 -77.736,32.35 -77.736,32.621 -78.59,32.621 -78.59,32.35 -78.59,31.35 -79.444,31.35 -79.444,32.35 -79.444,32.621 -80.298,32.621 -80.298,32.35 -80.725,32.35 v1(-81.925,32.35)
  L2 w0.254: v1(-85.525,26.025) -84.725,25.225 -78.675,25.225 -78.175,24.725 -78.175,23.875 -78.9,23.15 -85.1,23.15 -85.575,22.675 -85.575,21.975 -85.1,21.5 -67.175,21.5 -61.75,16.075 -59.8,16.075 -59.075,16.8 v1(-46,16.8)
  L4 w0.254: ST3.32@-83.25,40.175 -83.25,38.525 -83.25,38.098 -82.25,38.098 -82.25,37.244 -83.25,37.244 -84.25,37.244 -84.25,36.39 -83.25,36.39 -82.25,36.39 -82.25,35.536 -83.25,35.536 -84.25,35.536 -84.25,34.682 -83.25,34.682 -83.25,33.828 -83.25,33.675 v1(-81.925,32.35)
NetMC1_28: MC1.28 ST3.34 | length 88
  L1 w0.254: v1(-80.85,33.825) -79.275,32.25 v1(-79.275,9.525) ; v1(-39.175,6.5) -37.1,8.575 -37.1,13 -37.815,13.715 MC1.28@-37.815,19.279
  L2 w0.254: v1(-79.275,9.525) -75.275,5.525 -40.15,5.525 v1(-39.175,6.5)
  L4 w0.254: ST3.34@-82.25,40.175 -82.25,39.05 -80.85,37.65 v1(-80.85,33.825)
NetMC1_32: MC1.32 ST3.10 | length 111.5
  L1 w0.254: v1(-35.825,18.025) -35.815,18.035 MC1.32@-35.815,19.279
  L2 w0.254: v1(-90.35,20.525) -89.275,20.525 -88.927,20.525 -88.927,19.525 -88.073,19.525 -88.073,20.525 -87.219,20.525 -87.219,19.525 -86.365,19.525 -86.365,20.525 -85.511,20.525 -85.511,19.525 -84.657,19.525 -84.657,20.525 -83.803,20.525 -83.803,19.525 -82.949,19.525 -82.949,20.525 -82.095,20.525 -82.095,19.525 -81.241,19.525 -81.241,20.525 -80.387,20.525 -80.387,19.525 -79.533,19.525 -79.533,20.525 -78.679,20.525 -78.679,19.525 -77.825,19.525 -77.825,20.525 -76.971,20.525 -76.971,19.525 -76.117,19.525 -76.117,20.525 -75.263,20.525 -75.263,19.525 -74.409,19.525 -74.409,20.525 -73.555,20.525 -73.555,20.177 -72.701,20.177 -72.701,20.525 -72.701,21.146 -71.847,21.146 -71.847,20.525 -71.847,19.525 -70.993,19.525 -70.993,20.525 -70.993,21.146 -70.139,21.146 -70.139,20.525 -70.139,19.525 -69.285,19.525 -69.285,20.525 -69.285,21.146 -68.431,21.146 -68.431,20.525 -68.431,19.525 -67.577,19.525 -67.577,20.525 -67.15,20.525 -66.552,19.927 -66.25,19.625 -62.2,15.575 v1(-48.25,15.575)
  L4 w0.254: ST3.10@-94.25,40.175 -94.25,30.65 -93.575,29.975 -93.575,23.75 -93.275,23.45 -92.947,23.122 -92.551,23.519 -91.947,22.915 -92.343,22.518 -93.007,21.854 -92.404,21.25 -91.739,21.914 -91.438,21.612 v1(-90.35,20.525) ; v1(-48.25,15.575) -45.8,18.025 v1(-35.825,18.025)
NetMC1_41: MC1.41 ST3.7 | length 112.1
  L1 w0.254: v1(-41.175,6.65) -41.175,9.125 v1(-37.725,12.575) ; v1(-31.375,13.9) -31.315,13.96 MC1.41@-31.315,19.279
  L3 w0.254: v1(-91.4,11.8) -73.075,11.8 -72.648,11.8 -72.648,12.721 -71.794,12.721 -71.794,11.8 -71.794,11.308 -70.94,11.308 -70.94,11.8 -70.94,12.721 -70.086,12.721 -70.086,11.8 -70.086,11.308 -69.232,11.308 -69.232,11.8 -69.232,12.721 -68.378,12.721 -68.378,11.8 -67.524,11.8 -67.524,12.721 -66.67,12.721 -66.67,11.8 -65.75,11.8 -59.2,11.8 -54.05,6.65 v1(-41.175,6.65)
  L2 w0.254: v1(-37.725,12.575) -32.7,12.575 v1(-31.375,13.9)
  L4 w0.254: ST3.7@-95.75,40.175 -95.75,29.35 -94.975,28.575 -94.975,14.375 -92.4,11.8 v1(-91.4,11.8)
NetMC1_42: MC1.42 ST3.6 | length 112.7
  L1 w0.254: v1(-37.6,5.95) -30.825,12.725 -30.825,19.269 MC1.42@-30.815,19.279
  L3 w0.254: v1(-93.6,10.875) -69.475,10.875 -68.997,10.875 -68.997,9.948 -68.143,9.948 -68.143,10.875 -68.143,11.373 -67.289,11.373 -67.289,10.875 -67.289,9.948 -66.435,9.948 -66.435,10.875 -66.435,11.373 -65.581,11.373 -65.581,10.875 -65.581,9.948 -64.727,9.948 -64.727,10.875 -64.3,10.875 -59.675,10.875 -58,9.2 -58,8.225 -55.725,5.95 v1(-37.6,5.95)
  L4 w0.254: ST3.6@-96.25,40.175 -96.25,28.275 -95.55,27.575 -95.55,12.825 v1(-93.6,10.875)
NetMC1_43: MC1.43 ST3.5 | length 112.7
  L1 w0.254: v1(-37.9,3.35) -30.315,10.935 MC1.43@-30.315,19.279
  L3 w0.254: v1(-96.05,6.15) -93.25,3.35 v1(-37.9,3.35)
  L4 w0.254: ST3.5@-96.75,40.175 -96.75,27.5 -96.05,26.8 v1(-96.05,6.15)
NetMC1_47: MC1.47 ST3.26 | length 111.5
  L1 w0.254: v1(-30.3,22.6) -29.725,22.025 MC1.47@-28.05,22.025
  L2 w0.254: v1(-84.475,14.775) -69.7,14.775 -69.4,14.475 -63.15,14.475 -62.6,15.025 -46.375,15.025 v1(-45.775,15.625) ; v1(-30.3,22.6) -30.5,22.6 -30.8,22.3 -30.8,21.85 -30.4,21.45 -30.4,17.775 v1(-29.55,16.925)
  L4 w0.254: ST3.26@-86.25,40.175 -86.25,29.25 -86.25,28.823 -85.281,28.823 -85.281,27.969 -86.25,27.969 -87.219,27.969 -87.219,27.115 -86.25,27.115 -85.881,27.115 -85.881,26.261 -86.25,26.261 -87.217,26.261 -87.217,25.407 -86.25,25.407 -85.281,25.407 -85.281,24.553 -86.25,24.553 -87.219,24.553 -87.219,23.699 -86.25,23.699 -85.281,23.699 -85.281,22.845 -86.25,22.845 -87.219,22.845 -87.219,21.991 -86.25,21.991 -85.281,21.991 -85.281,21.137 -86.25,21.137 -87.219,21.137 -87.219,20.283 -86.25,20.283 -85.281,20.283 -85.281,19.429 -86.25,19.429 -86.25,19.225 -86.25,16.55 v1(-84.475,14.775) ; v1(-45.775,15.625) -44.214,17.186 -33.986,17.186 -33.725,16.925 v1(-29.55,16.925)
NetMC1_48: MC1.48 R20.2 | length 14.9
  L1 w0.254: R20.2@-28.3,19.35 -28.275,19.325 v1(-28.275,18.275) ; MC1.48@-28.05,22.525 v1(-23.175,22.525)
  L4 w0.254: v1(-28.275,18.275) -23.875,18.275 -23.175,18.975 v1(-23.175,22.525)
NetMC1_51: MC1.51 ST3.9 | length 111.5
  L1 w0.254: v1(-47.3,28.65) -44.975,26.325 -44.975,25.875 -43.125,24.025 v1(-37.525,24.025) ; v1(-30.8,24.025) MC1.51@-28.05,24.025
  L3 w0.254: v1(-37.525,24.025) v1(-30.8,24.025)
  L2 w0.254: v1(-94.75,30.175) -93.198,28.623 -92.75,28.623 -92.389,28.623 -92.389,29.459 -91.535,29.459 -91.535,28.623 -91.535,27.879 -90.681,27.879 -90.681,28.623 -90.681,28.971 -89.827,28.971 -89.827,28.623 -89.827,27.879 -88.973,27.879 -88.973,28.623 -88.973,28.971 -88.119,28.971 -88.119,28.623 -88.119,27.879 -87.265,27.879 -87.265,28.623 -86.411,28.623 -86.411,27.879 -85.557,27.879 -85.557,28.623 -84.703,28.623 -84.703,27.879 -83.849,27.879 -83.849,28.623 -82.995,28.623 -82.995,27.879 -82.141,27.879 -82.141,28.623 -81.287,28.623 -81.287,27.879 -80.433,27.879 -80.433,28.623 -79.579,28.623 -79.579,27.879 -78.725,27.879 -78.725,28.623 -77.871,28.623 -77.871,27.879 -77.017,27.879 -77.017,28.623 -76.163,28.623 -76.163,27.879 -75.309,27.879 -75.309,28.623 -74.455,28.623 -74.455,28.486 -73.601,28.486 -73.601,28.623 -72.747,28.623 -72.747,27.879 -71.893,27.879 -71.893,28.623 -71.039,28.623 -71.039,27.879 -70.185,27.879 -70.185,28.623 -69.331,28.623 -69.331,27.879 -68.477,27.879 -68.477,28.623 -68.05,28.623 -67.6,28.623 -67.173,28.623 -67.173,29.513 -66.319,29.513 -66.319,28.623 -65.465,28.623 -65.465,29.565 -64.611,29.565 -64.611,28.623 -63.757,28.623 -63.757,29.565 -62.903,29.565 -62.903,28.623 -62.049,28.623 -62.049,29.565 -61.195,29.565 -61.195,28.623 -60.341,28.623 -60.341,29.565 -59.487,29.565 -59.487,28.623 -57.9,28.623 -47.327,28.623 v1(-47.3,28.65)
  L4 w0.254: v1(-94.75,30.175) ST3.9@-94.75,40.175
NetMC1_52: MC1.52 ST3.15 | length 110.8
  L1 w0.254: v1(-42.85,33.55) -37.075,33.55 v1(-32.95,29.425) ; v1(-32.575,24.95) -32.15,24.525 MC1.52@-28.05,24.525
  L3 w0.254: v1(-68.875,29.325) -68.599,29.601 -68.004,30.196 -67.617,29.809 -67.013,30.413 -67.4,30.8 -68.107,31.507 -67.503,32.111 -66.796,31.404 -66.409,31.017 -65.805,31.62 -66.192,32.008 -66.458,32.273 -65.854,32.877 -65.589,32.611 -65.235,32.258 -64.631,32.862 -64.985,33.215 -65.692,33.922 -65.088,34.526 -64.381,33.819 -63.674,33.112 -63.07,33.716 -63.777,34.423 -63.475,34.725 -63.3,34.9 -58.1,34.9 -56.75,33.55 v1(-42.85,33.55)
  L2 w0.254: v1(-91.75,30.175) -90.9,29.325 -87.675,29.325 -86.478,29.325 -86.478,28.977 -85.624,28.977 -85.624,29.325 -85.624,30.321 -84.77,30.321 -84.77,29.325 -84.77,28.977 -83.916,28.977 -83.916,29.325 -83.916,30.321 -83.062,30.321 -83.062,29.325 -83.062,28.977 -82.208,28.977 -82.208,29.325 -82.208,30.321 -81.354,30.321 -81.354,29.325 -81.354,28.977 -80.5,28.977 -80.5,29.325 -80.5,30.321 -79.646,30.321 -79.646,29.325 -79.646,28.977 -78.792,28.977 -78.792,29.325 -78.792,30.321 -77.938,30.321 -77.938,29.325 -77.938,28.977 -77.084,28.977 -77.084,29.325 -77.084,29.525 -76.23,29.525 -76.23,29.325 -76.23,28.977 -75.376,28.977 -75.376,29.325 -75.376,29.571 -74.522,29.571 -74.522,29.325 -74.522,28.977 -73.668,28.977 -73.668,29.325 -72.814,29.325 -72.814,28.977 -71.96,28.977 -71.96,29.325 -71.106,29.325 -71.106,28.977 -70.252,28.977 -70.252,29.325 -69.825,29.325 v1(-68.875,29.325) ; v1(-32.95,29.425) -32.575,29.05 v1(-32.575,24.95)
  L4 w0.254: v1(-91.75,30.175) ST3.15@-91.75,40.175
NetMC1_56: MC1.56 ST3.8 | length 110.6
  L1 w0.254: v1(-30.575,27.85) -30.575,27.075 -30.025,26.525 MC1.56@-28.05,26.525
  L3 w0.254: v1(-47.75,27.975) -40.15,27.975 -39.6,28.525 -37.1,28.525 -36.425,27.85 v1(-30.575,27.85)
  L2 w0.254: v1(-94.2,27.6) -94.125,27.525 -68.2,27.525 -68.136,27.525 -68.136,27.254 -67.282,27.254 -67.282,27.525 -67.282,28.269 -66.428,28.269 -66.428,27.525 -66.428,27.254 -65.574,27.254 -65.574,27.525 -65.574,28.269 -64.72,28.269 -64.72,27.525 -64.72,27.254 -63.866,27.254 -63.866,27.525 -63.866,28.269 -63.012,28.269 -63.012,27.525 -63.012,27.248 -62.158,27.248 -62.158,27.525 -62.158,28.269 -61.304,28.269 -61.304,27.525 -61.304,26.777 -60.45,26.777 -60.45,27.525 -60.45,28.269 -59.596,28.269 -59.596,27.525 -59.596,26.927 -58.742,26.927 -58.742,27.525 -58.742,28.269 -57.888,28.269 -57.888,27.525 -57.888,26.525 -57.034,26.525 -57.034,27.525 -57.034,28.269 -56.18,28.269 -56.18,27.525 -56.18,26.525 -55.326,26.525 -55.326,27.525 -55.326,28.269 -54.472,28.269 -54.472,27.525 -54.472,26.525 -53.618,26.525 -53.618,27.525 -53.618,28.269 -52.764,28.269 -52.764,27.525 -52.764,26.525 -51.91,26.525 -51.91,27.525 -51.91,28.269 -51.056,28.269 -51.056,27.525 -51.056,26.525 -50.202,26.525 -50.202,27.525 -49.775,27.525 -48.875,27.525 -48.425,27.975 v1(-47.75,27.975)
  L4 w0.254: ST3.8@-95.25,40.175 -95.25,29.725 -94.45,28.925 -94.45,27.85 v1(-94.2,27.6)